# Altium PCB MasterBoard.PcbDoc (part 1 of 4)
Units mil, origin at the board's own origin, x right, y up, seen from the top; angles counter-clockwise.
Board outline 11195 x 7075 mil, 2 copper layers (Top Layer, Bottom Layer); 563 components, 331 nets, 1395 pads, 369 vias.
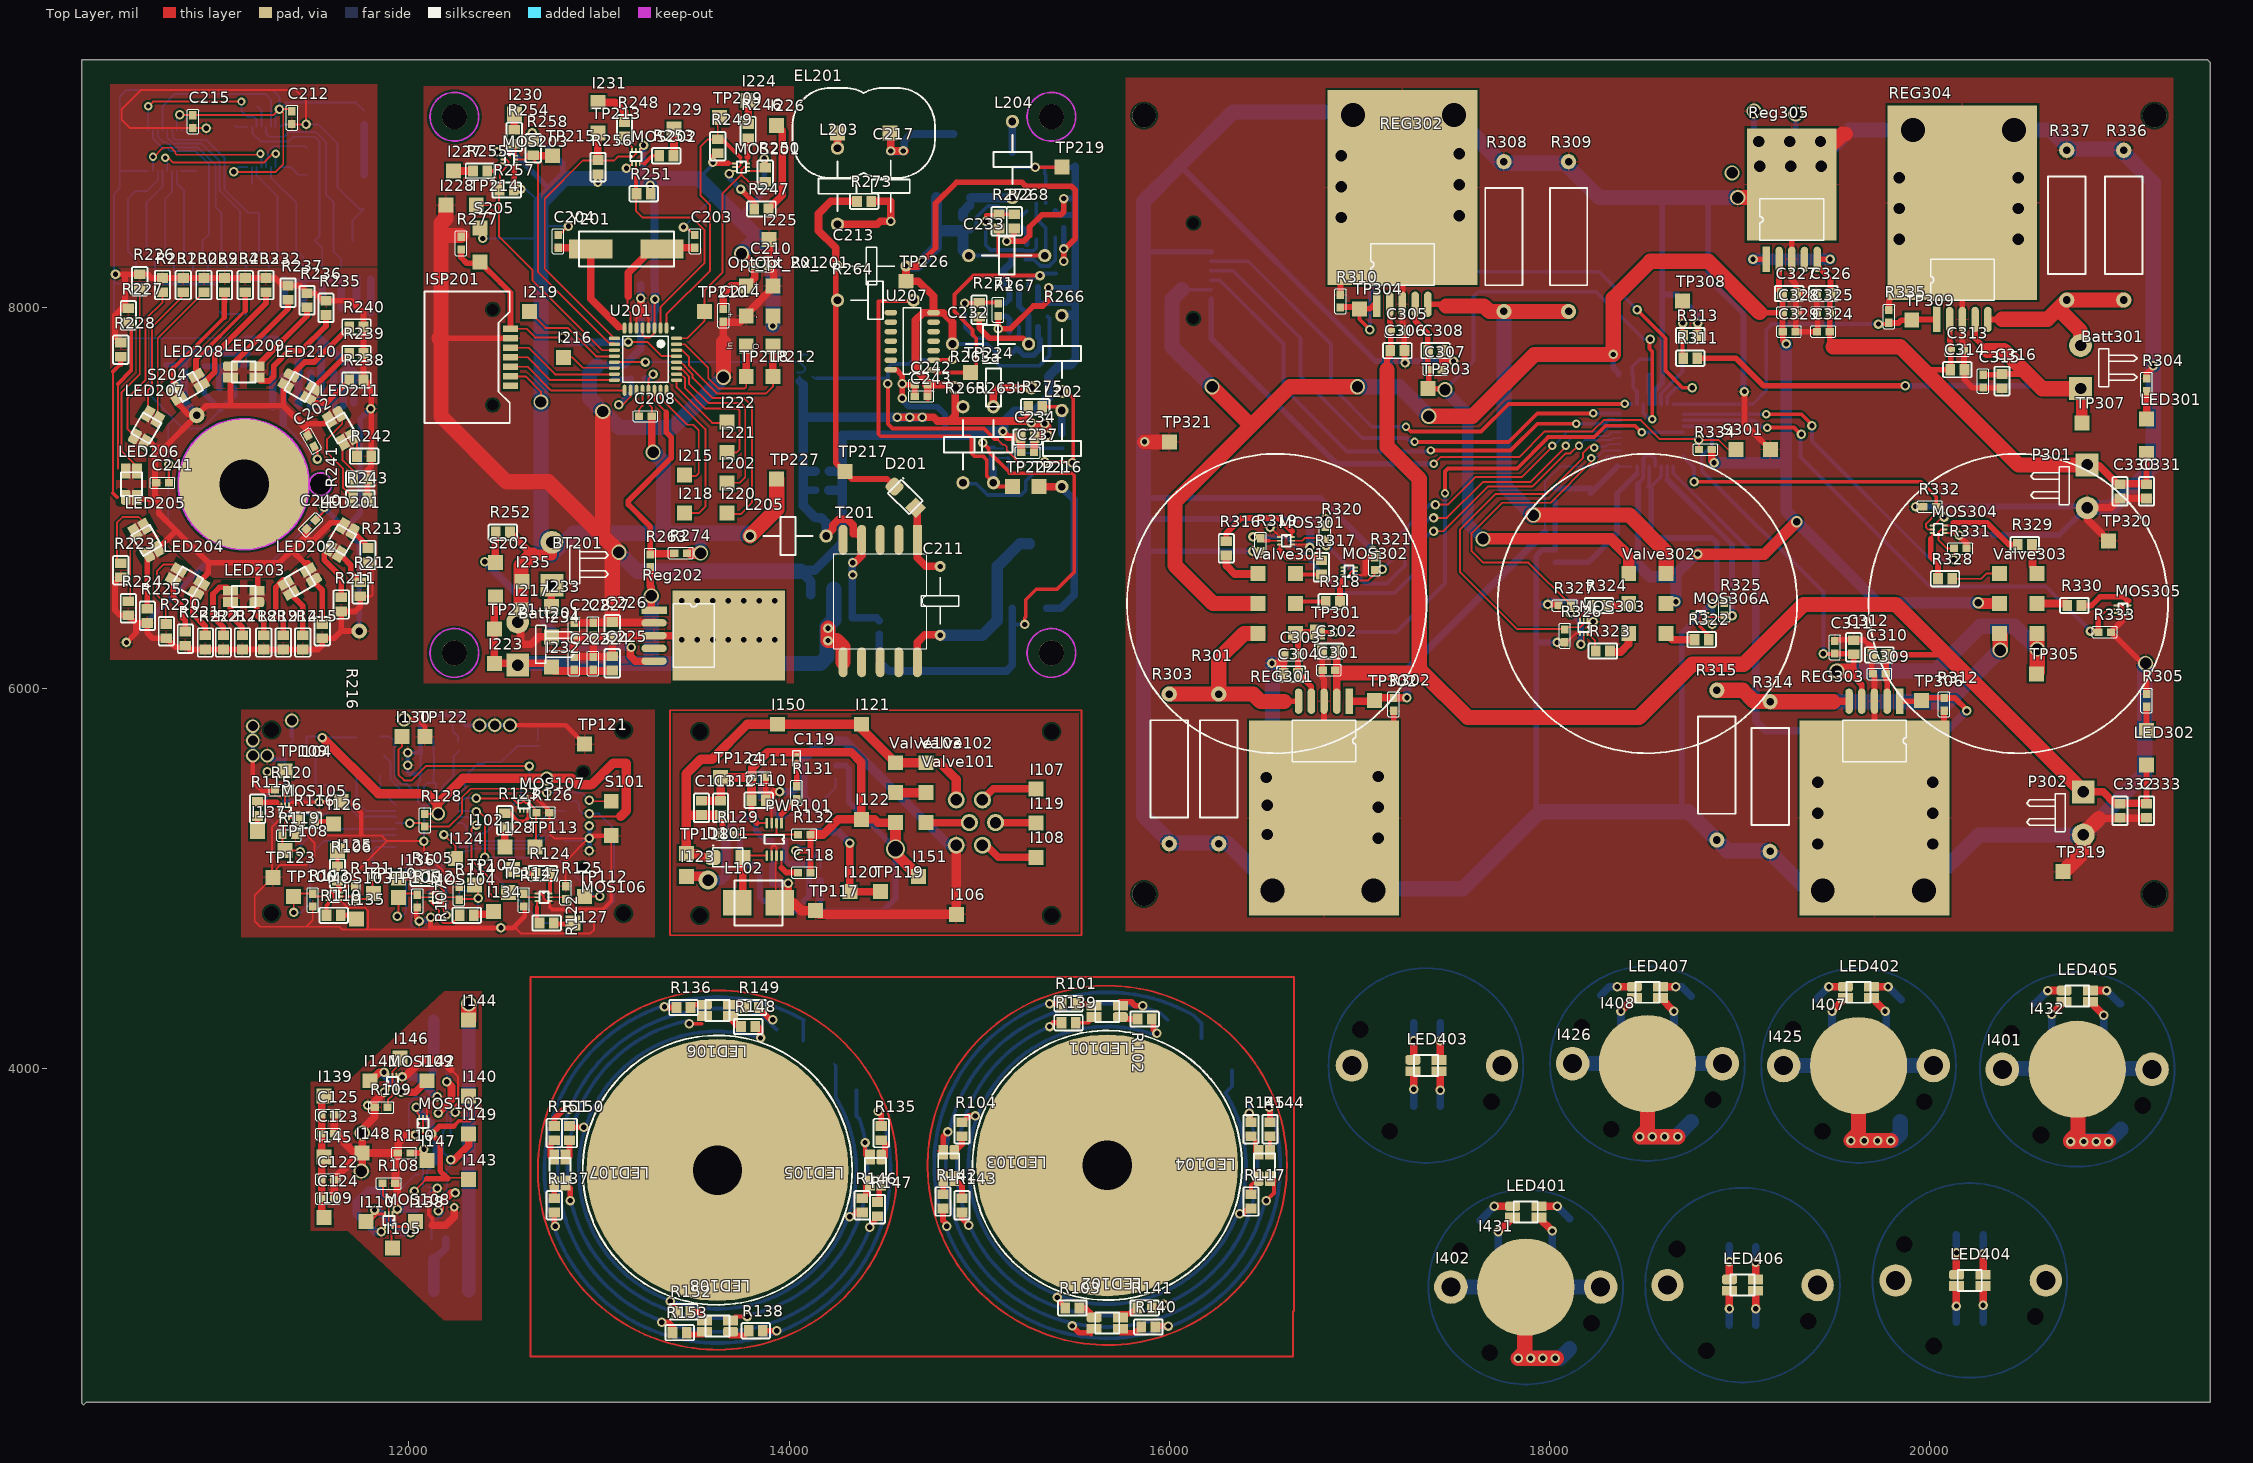
[diagram p0: Top Layer view]
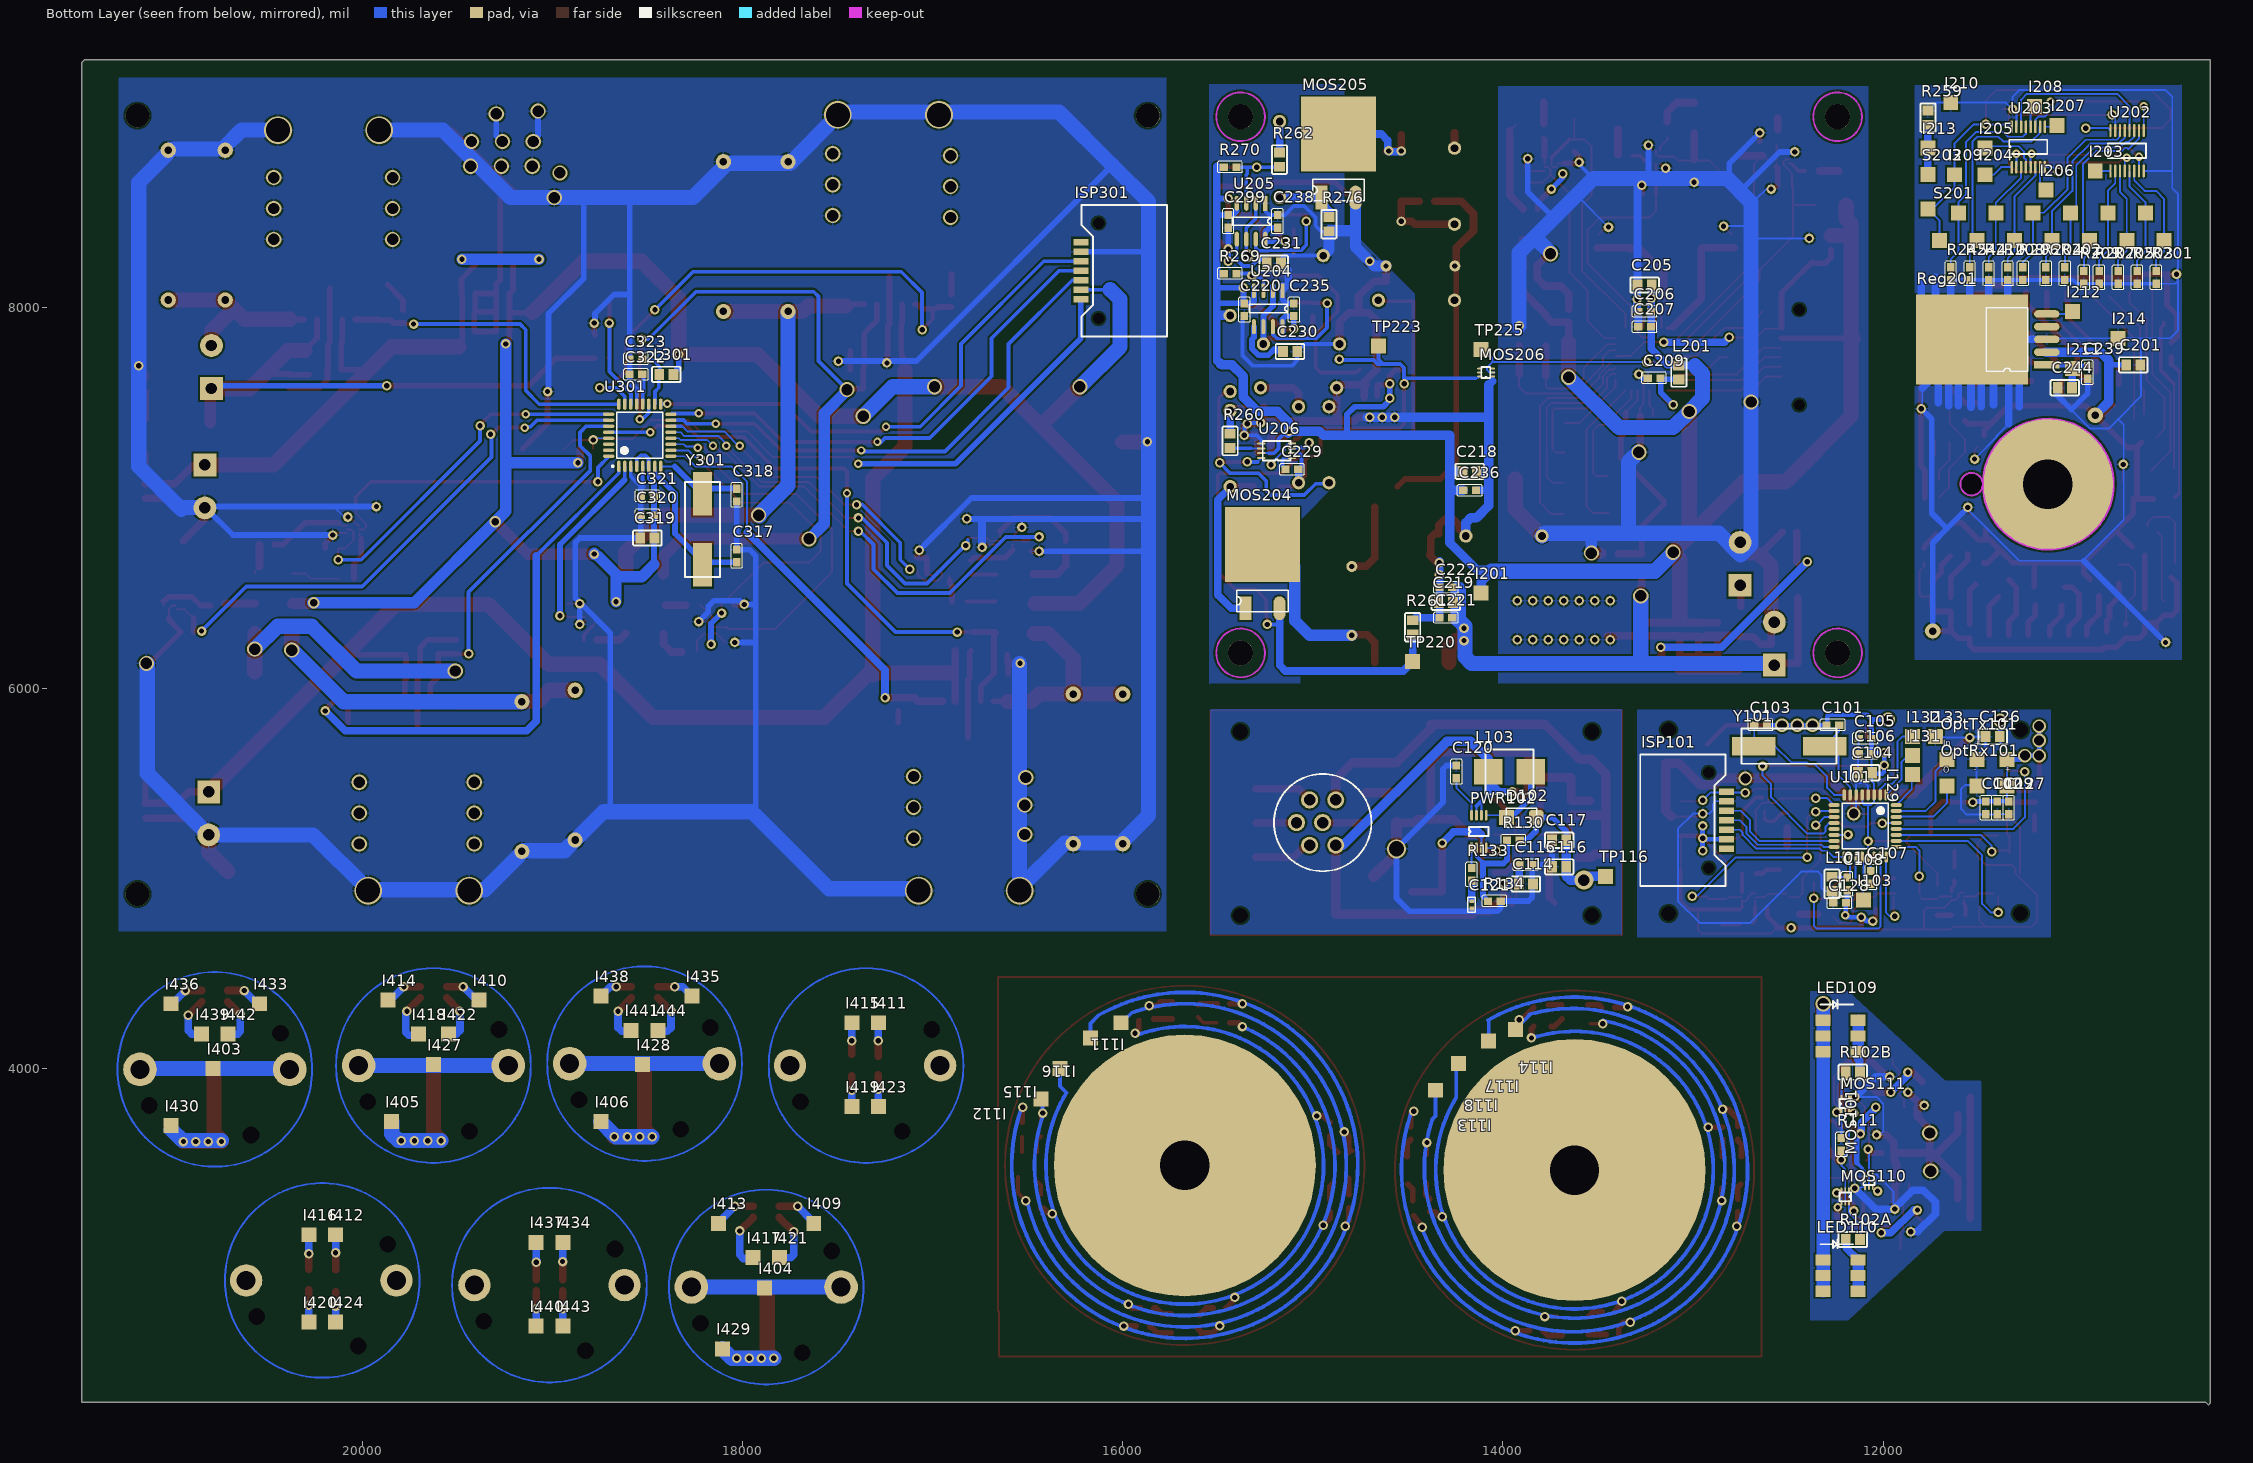
[diagram p1: Bottom Layer view, seen from below]

## Layer stack, top to bottom
Top Layer: signal copper 1.4
Dielectric: dielectric 12.6, FR-4, Dk 4.8
Bottom Layer: signal copper 1.4

## Board outline
10290,9305 21460,9305 21475,9290 21475,2245 10305,2245 10290,2230 10280,2240 10280,9305

## Design rules (kind name [scope] priority, off if disabled: settings)
Clearance [All] p1: gap=10
ComponentClearance [All] p1 off: gap=10 collisioncheckmode=3 verticalgap=10 showdistances=FALSE
HoleSize [All] p1: absolutevalues=TRUE maxlimit=260 minlimit=1 maxpercent=80.000 minpercent=20.000
MinimumSolderMaskSliver [All] p1: minsoldermaskwidth=2.5
PasteMaskExpansion [All] p1 off: expansion=0
PlaneClearance [All] p1: clearance=39.37
PlaneConnect [All] p1: planeconnectstyle=Relief reliefexpansion=20 reliefentries=4 reliefconductorwidth=10 reliefairgap=20
PolygonConnect [All] p1: connectstyle=Relief reliefconductorwidth=10 reliefentries=4 polygonreliefangle="90 Angle"
RoomDefinition Glasses-LEDBoard [InComponentClass('Glasses-LEDBoard')] p1: confinementstyle=ConfineIn formatcopy=TRUE lockcomponents=FALSE outline 11405,4460 11405,2595 12450,2595 12450,4460
RoomDefinition Glasses-LensBoard [InComponentClass('Glasses-LensBoard')] p2: confinementstyle=ConfineIn formatcopy=TRUE lockcomponents=FALSE outline 16685,4505 12630,4505 12630,2475 16685,2475
RoomDefinition Valve [InComponentClass('Valve')] p3: confinementstyle=ConfineIn formatcopy=TRUE lockcomponents=FALSE outline 16760,2285 21365,2285 21365,4605 16760,4605
RoomDefinition Glasses-PSUBoard [InComponentClass('Glasses-PSUBoard')] p4: confinementstyle=ConfineIn formatcopy=TRUE lockcomponents=FALSE outline 15560,5905 13350,5905 13350,4680 15560,4680
RoomDefinition Glasses [InComponentClass('Glasses')] p5: confinementstyle=ConfineIn formatcopy=TRUE lockcomponents=FALSE outline 11120,4665 13300,4665 13300,5935 11120,5935
RoomDefinition Controller-IOBoard [InComponentClass('Controller-IOBoard')] p6: confinementstyle=ConfineIn formatcopy=TRUE lockcomponents=FALSE outline 10350,9250 10350,6105 11895,6105 11895,9250
RoomDefinition Controller [InComponentClass('Controller')] p7: confinementstyle=ConfineIn formatcopy=TRUE lockcomponents=FALSE outline 11965,5970 15660,5970 15660,9250 11965,9250
RoomDefinition Charger [InComponentClass('Charger')] p8: confinementstyle=ConfineIn formatcopy=TRUE lockcomponents=FALSE outline 15710,4665 21340,4665 21340,9285 15710,9285
RoutingVias [All] p1: holewidth=28 width=50 viastyle="Through Hole" minholewidth=20 minwidth=40 maxholewidth=260 maxwidth=300
SilkToSilkClearance [All] p1 off: silktosilkclearance=10
SilkscreenOverComponentPads [All] p1 off: minsilkscreentomaskgap=10
SolderMaskExpansion [All] p1: expansion=4
Width [All] p1: maxlimit=118.11 minlimit=10 preferedwidth=20
20 further rules are at their usual default settings.

## Classes and differential pairs
component class Glasses-LensBoard: I111 I112 I113 I114 I115 I116 I117 I118 LED101 LED102 LED103 LED104 LED105 LED106 LED107 LED108 R101 R102 R103 R104 R117 R135 R136 R137 R138 R139 R140 R141 R142 R143 R144 R145 R146 R147 R148 R149 R150 R151 R152 R153
component class Glasses-PSUBoard: C110 C111 C112 C113 C114 C115 C116 C117 C118 C119 C120 C121 D101 D102 I106 I107 I108 I119 I120 I121 I122 I123 I150 I151 L102 L103 PWR101 PWR102 R129 R130 R131 R132 R133 R134 TP116 TP117 TP118 TP119 TP124 Valve101 Valve102 Valve103
component class Glasses-LEDBoard: C122 C123 C124 C125 I105 I109 I110 I138 I139 I140 I141 I142 I143 I144 I145 I146 I147 I148 I149 LED109 LED110 MOS101 MOS102 MOS108 MOS109 MOS110 MOS111 R102A R102B R108 R109 R110 R111 TP126
component class Controller-IOBoard: C201 C202 C212 C215 C239 C240 C241 C244 I203 I204 I205 I206 I207 I208 I209 I210 I211 I212 I213 I214 LED201 LED202 LED203 LED204 LED205 LED206 LED207 LED208 LED209 LED210 LED211 R201 R202 R203 R204 R205 R206 R207 R208 R209 R210 R211 R212 R213 R214 R215 R216 R217 R218 R219 R220 R221 R222 R223 R224 R225 R226 R227 R228 R229 R230 R231 R232 R233 R234 R235 R236 R237 R238 R239 R240 R241 R242 R243 R244 R245 R259 Reg201 S201 S203 S204 TP201 TP203 TP204 TP205 TP206 TP207 TP208 U202 U203
component class Glasses: C101 C102 C103 C104 C105 C106 C107 C108 C109 C126 C127 C128 I102 I103 I104 I124 I125 I126 I127 I128 I129 I130 I131 I132 I133 I134 I135 I136 I137 I? ISP101 L101 MOS103 MOS104 MOS105 MOS106 MOS107 OptRx101 OptTx101 R105 R106 R107 R112 R113 R114 R115 R116 R118 R119 R120 R121 R122 R123 R124 R125 R126 R127 R128 S101 TP105 TP106 TP107 TP108 TP109 TP110 TP112 TP113 TP114 TP121 TP122 TP123 U101 Y101
component class Controller: Batt201 BT201 C203 C204 C205 C206 C207 C208 C209 C210 C211 C213 C214 C217 C218 C219 C220 C221 C222 C223 C224 C225 C226 C227 C228 C229 C230 C231 C232 C233 C234 C235 C236 C237 C238 C242 C243 C299 D201 EL201 I201 I202 I215 I216 I217 I218 I219 I220 I221 I222 I223 I224 I225 I226 I227 I228 I229 I230 I231 I232 I233 I234 I235 ISP201 L201 L202 L203 L204 L205 MOS201 MOS202 MOS203 MOS204 MOS205 MOS206 Opt_Rx_201 Opt_Tx_201 R246 R247 R248 R249 R250 R251 R252 R253 R254 R255 R256 R257 R258 R260 R261 R262 R263 R263a R263b R264 R265 R266 R267 R268 R269 R270 R271 R272 R273 R274 R275 R276 R277 Reg202 S202 S205 T201 TP209 TP210 TP212 TP213 TP214 TP215 TP216 TP217 TP218 TP219 TP220 TP221 TP222 TP223 TP224 TP225 TP226 TP227 U201 U204 U205 U206 U207 Y201
component class Charger: Batt301 C301 C302 C303 C304 C305 C306 C307 C308 C309 C310 C311 C312 C313 C314 C315 C316 C317 C318 C319 C320 C321 C322 C323 C324 C325 C326 C327 C328 C329 C330 C331 C332 C333 D? ISP301 L301 LED301 LED302 MOS301 MOS302 MOS303 MOS304 MOS305 MOS306A P301 P302 R301 R302 R303 R304 R305 R308 R309 R310 R311 R312 R313 R314 R315 R316 R317 R318 R319 R320 R321 R322 R323 R324 R325 R326 R327 R328 R329 R330 R331 R332 R333 R334 R335 R336 R337 R? REG301 REG302 REG303 REG304 Reg305 S301 TP301 TP302 TP303 TP304 TP305 TP306 TP307 TP308 TP309 TP319 TP320 TP321 U301 Valve301 Valve302 Valve303 Y301
component class Valve: I401 I402 I403 I404 I405 I406 I407 I408 I409 I410 I411 I412 I413 I414 I415 I416 I417 I418 I419 I420 I421 I422 I423 I424 I425 I426 I427 I428 I429 I430 I431 I432 I433 I434 I435 I436 I437 I438 I439 I440 I441 I442 I443 I444 LED401 LED402 LED403 LED404 LED405 LED406 LED407

## Components (designator, comment, footprint, x,y, rotation, side; value= is the part's Value field where it differs from the comment)
Batt201 "BaseBankSocket" HDR1X2H 12620,6180 r90 top
Batt301 "BaseBankSocket" HDR1X2H 20840,7635 r90 top
BT201 "Battery" HDR1X2H 12800,6600 r90 top
C101 "18pf" 0603 12265,5805 r180 bottom
C102 "100nf" 0603 11460,5370 r270 bottom
C103 "18pf" 0603 12645,5805 r0 bottom
C104 "10uf" 0805 12095,5555 r0 bottom
C105 "1uf" 0603 12095,5735 r0 bottom
C106 "100nf" 0603 12095,5655 r0 bottom
C107 "100nf" 0603 12065,5005 r270 bottom
C108 "100nf" 0603 12190,4970 r90 bottom
C109 "100nf" 0603 11400,5370 r270 bottom
C110 "10uf" 0805 13840,5410 r0 top
C111 "1uf" 0603 13840,5530 r0 top
C112 "10uf" 0805 13640,5370 r270 top
C113 "10uf" 0805 13540,5370 r270 top
C114 "10uf" 0805 13880,4970 r0 bottom
C115 "1uf" 0603 13880,5070 r0 bottom
C116 "10uf" 0805 13705,5060 r180 bottom
C117 "10uf" 0805 13705,5200 r180 bottom
C118 "100nf" 0603 14080,5030 r180 top
C119 "2.2nf" 0402 14040,5630 r270 top
C120 "100nf" 0603 14245,5560 r270 bottom
C121 "2.2nf" 0402 14165,4860 r90 bottom
C122 "1uf" 0603 11575,3415 r180 top
C123 "100nf" 0603 11575,3655 r180 top
C124 "1uf" 0603 11575,3315 r180 top
C125 "100nf" 0603 11575,3755 r180 top
C126 "10uf" 0805 11425,5745 r0 bottom
C127 "1uf" 0603 11340,5370 r270 bottom
C128 "100nf" 0603 12230,4870 r0 bottom
C201 "10uf" 0805 10685,7700 r0 bottom
C202 "1uf" 0603 11485,7300 r120 top
C203 "18pf" 0603 13505,8350 r270 top
C204 "18pf" 0603 12785,8350 r270 top
C205 "10uf" 0805 13255,8120 r180 bottom
C206 "1uf" 0603 13255,7980 r180 bottom
C207 "100nf" 0603 13255,7900 r180 bottom
C208 "100nf" 0603 13245,7430 r180 top
C209 "100nf" 0603 13205,7630 r180 bottom
C210 "100nf" 0603 13855,8220 r0 top
C211 "Cap HV" "10n MU Capacitor (HV)" 14795,6640 r270 top
C212 "1uf" 0603 11385,9000 r90 top
C213 "Cap HV" "10n MU Capacitor (HV)" 14615,8220 r180 top
C214 "100nf" 0603 13655,7960 r270 top
C215 "1uf" 0603 10865,8980 r270 top
C217 "Cap HV" "22N MU Capacitor (HV)" 14535,8825.04 r270 top
C218 "10uf" 0805 14175,7140 r180 bottom
C219 "10uf" 0805 14300,6450 r0 bottom
C220 "1uf" 0603 15360,7990 r270 bottom
C221 "1uf" 0603 14300,6370 r0 bottom
C222 "100nf" 0603 14300,6530 r0 bottom
C223 "100nf" 0603 12870,6130 r270 top
C224 "1uf" 0603 12970,6130 r270 top
C225 "10uf" 0805 13070,6130 r270 top
C226 "10uf" 0805 13070,6310 r90 top
C227 "1uf" 0603 12970,6310 r90 top
C228 "100nf" 0603 12870,6310 r90 top
C229 "100nF" 0603 15110,7150 r180 bottom
C230 "10uf" 0805 15120,7770 r0 bottom
C231 "10uf" 0805 15205,8235 r0 bottom
C232 "Cap Through-Hole" "Axial 0.4 MU" 14860,7810 r0 top
C233 "Cap Through-Hole" "Axial 0.4 MU" 14945,8275 r0 top
C234 "10uf" 0805 15255,7320 r0 top
C235 "1uf" 0603 15100,7990 r90 bottom
C236 "100nf" 0603 14175,7040 r180 bottom
C237 "1uf" 0603 15255,7240 r0 top
C238 "100nf" 0603 15185,8455 r90 bottom
C239 "100nf" 0603 10925,7660 r270 bottom
C240 "1uf" 0603 11485,6860 r225 top
C241 "1uf" 0603 10705,7080 r180 top
C242 "1uf" 0603 14695,7595 r0 top
C243 "100nf" 0603 14695,7535 r0 top
C244 "10uf" 0805 11045,7580 r0 bottom
C299 "100nf" 0603 15445,8455 r270 bottom
C301 "1uf" 0603 16840,6095 r0 top
C302 "10uf" 0805 16840,6195 r0 top
C303 "1uf" 0603 16640,6175 r0 top
C304 "10uf" 0805 16640,6075 r0 top
C305 "1uf" 0603 17200,7875 r180 top
C306 "10uf" 0805 17200,7775 r180 top
C307 "1uf" 0603 17400,7675 r180 top
C308 "10uf" 0805 17400,7775 r180 top
C309 "1uf" 0603 19735,6075 r0 top
C310 "10uf" 0805 19735,6175 r0 top
C311 "1uf" 0603 19500,6215 r270 top
C312 "10uf" 0805 19600,6215 r270 top
C313 "1uf" 0603 20145,7775 r180 top
C314 "10uf" 0805 20145,7675 r180 top
C315 "1uf" 0603 20280,7615 r90 top
C316 "10uf" 0805 20380,7615 r90 top
C317 "18pf" 0603 18030,6695 r270 bottom
C318 "18pf" 0603 18030,7015 r90 bottom
C319 "10uf" 0805 18500,6790 r180 bottom
C320 "1uf" 0603 18500,6910 r180 bottom
C321 "100nf" 0603 18500,7010 r180 bottom
C322 "100nf" 0603 18560,7650 r180 bottom
C323 "100nf" 0603 18560,7730 r180 bottom
C324 "100nf" 0603 19440,7875 r0 top
C325 "1uf" 0603 19440,7975 r0 top
C326 "10uf" 0805 19440,8075 r0 top
C327 "10uf" 0805 19260,8075 r180 top
C328 "1uf" 0603 19260,7975 r180 top
C329 "100nf" 0603 19260,7875 r180 top
C330 "10uf" 0805 21000,7035 r90 top
C331 "10uf" 0805 21140,7035 r90 top
C332 "10uf" 0805 21000,5355 r90 top
C333 "10uf" 0805 21140,5355 r90 top
D101 "Diode BYG20D" BYG20J-E3 13600,5110 r0 top
D102 "Diode BYG20D" BYG20J-E3 13825,5320 r0 bottom
D201 "Diode BYG20D" BYG20J-E3 14555,7060 r315 top
EL201 "EL Connector" "HV connector" 14255,8920 r0 top
I102 "TestPoint" TestPoint 12545,5045 r90 top
I103 "TestPoint" TestPoint 12105,4885 r90 bottom
I104 "TestPoint" TestPoint 11645,5405 r90 top
I105 "TestPoint" TestPoint 11915,3055 r90 top
I106 "TestPoint" TestPoint 14880,4810 r270 top
I107 "TestPoint" TestPoint 15300,5470 r180 top
I108 "TestPoint" TestPoint 15300,5110 r180 top
I109 "TestPoint" TestPoint 11555,3215 r270 top
I110 "TestPoint" TestPoint 11775,3195 r270 top
I111 "TestPoint" TestPoint 16010,4240 r270 bottom
I112 "TestPoint" TestPoint 16430,3840 r270 bottom
I113 "TestPoint" TestPoint 14355,3885 r90 bottom
I114 "TestPoint" TestPoint 13935,4205 r90 bottom
I115 "TestPoint" TestPoint 16330,4000 r270 bottom
I116 "TestPoint" TestPoint 16170,4160 r270 bottom
I117 "TestPoint" TestPoint 14075,4145 r90 bottom
I118 "TestPoint" TestPoint 14235,4025 r90 bottom
I119 "TestPoint" TestPoint 15300,5290 r180 top
I120 "TestPoint" TestPoint 14320,4930 r270 top
I121 "TestPoint" TestPoint 14380,5810 r270 top
I122 "TestPoint" TestPoint 14380,5310 r270 top
I123 "TestPoint" TestPoint 13460,5010 r270 top
I124 "TestPoint" TestPoint 12245,5105 r0 top
I125 "TestPoint" TestPoint 11625,5145 r0 top
I126 "TestPoint" TestPoint 11605,5285 r270 top
I127 "TestPoint" TestPoint 12865,4765 r0 top
I128 "TestPoint" TestPoint 12505,5165 r90 top
I129 "TestPoint" TestPoint 11845,5545 r180 bottom
I130 "TestPoint" TestPoint 11965,5745 r0 top
I131 "TestPoint" TestPoint 11845,5645 r180 bottom
I132 "TestPoint" TestPoint 11845,5745 r180 bottom
I133 "TestPoint" TestPoint 11725,5745 r180 bottom
I134 "TestPoint" TestPoint 12445,4825 r0 top
I135 "TestPoint" TestPoint 11725,4785 r0 top
I136 "TestPoint" TestPoint 11945,5000 r0 top
I137 "TestPoint" TestPoint 11205,5245 r270 top
I138 "TestPoint" TestPoint 12035,3195 r0 top
I139 "TestPoint" TestPoint 11555,3855 r0 top
I140 "TestPoint" TestPoint 12315,3855 r0 top
I141 "TestPoint" TestPoint 11795,3935 r0 top
I142 "TestPoint" TestPoint 12095,3935 r0 top
I143 "TestPoint" TestPoint 12315,3415 r0 top
I144 "TestPoint" TestPoint 12315,4255 r0 top
I145 "TestPoint" TestPoint 11555,3535 r0 top
I146 "TestPoint" TestPoint 11955,4055 r0 top
I147 "TestPoint" TestPoint 12095,3515 r0 top
I148 "TestPoint" TestPoint 11755,3555 r0 top
I149 "TestPoint" TestPoint 12315,3655 r0 top
I150 "TestPoint" TestPoint 13940,5810 r270 top
I151 "TestPoint" TestPoint 14680,5010 r270 top
I201 "TestPoint" TestPoint 14115,6500 r0 bottom
I202 "TestPoint" TestPoint 13675,7080 r270 top
I203 "TestPoint" TestPoint 10885,8720 r180 bottom
I204 "TestPoint" TestPoint 11465,8700 r180 bottom
I205 "TestPoint" TestPoint 11465,8840 r0 bottom
I206 "TestPoint" TestPoint 11145,8620 r0 bottom
I207 "TestPoint" TestPoint 11085,8960 r0 bottom
I208 "TestPoint" TestPoint 11205,9060 r0 bottom
I209 "TestPoint" TestPoint 11625,8700 r0 bottom
I210 "TestPoint" TestPoint 11645,9080 r0 bottom
I211 "TestPoint" TestPoint 11005,7680 r0 bottom
I212 "TestPoint" TestPoint 11005,7980 r0 bottom
I213 "TestPoint" TestPoint 11765,8840 r0 bottom
I214 "TestPoint" TestPoint 10765,7840 r0 bottom
I215 "TestPoint" TestPoint 13450,7120 r90 top
I216 "TestPoint" TestPoint 12815,7740 r90 top
I217 "TestPoint" TestPoint 12590,6410 r90 top
I218 "TestPoint" TestPoint 13450,6920 r90 top
I219 "TestPoint" TestPoint 12635,7980 r90 top
I220 "TestPoint" TestPoint 13675,6920 r90 top
I221 "TestPoint" TestPoint 13675,7240 r90 top
I222 "TestPoint" TestPoint 13675,7400 r90 top
I223 "TestPoint" TestPoint 12450,6130 r90 top
I224 "TestPoint" TestPoint 13785,9090 r90 top
I225 "TestPoint" TestPoint 13895,8360 r90 top
I226 "TestPoint" TestPoint 13935,8960 r90 top
I227 "TestPoint" TestPoint 12235,8720 r90 top
I228 "TestPoint" TestPoint 12195,8540 r90 top
I229 "TestPoint" TestPoint 13395,8940 r90 top
I230 "TestPoint" TestPoint 12555,9020 r90 top
I231 "TestPoint" TestPoint 12995,9080 r90 top
I232 "TestPoint" TestPoint 12750,6110 r90 top
I233 "TestPoint" TestPoint 12750,6430 r90 top
I234 "TestPoint" TestPoint 12750,6270 r90 top
I235 "TestPoint" TestPoint 12595,6560 r90 top
I401 "Battery +VE" ValveBattery+VE 20775,3995 r180 top
I402 "Battery +VE" ValveBattery+VE 17875,2850 r180 top
I403 "ValvePad+ve" TestPoint 20785,4000 r180 bottom
I404 "ValvePad+ve" TestPoint 17885,2845 r180 bottom
I405 "ValvePad-ve" TestPoint 19845,3720 r180 bottom
I406 "ValvePad-ve" TestPoint 18745,3720 r180 bottom
I407 "Battery -VE" ValveBattery-VE 19625,4015 r0 top
I408 "Battery -VE" ValveBattery-VE 18515,4025 r0 top
I409 "ValvePadR" TestPoint 17625,3185 r180 bottom
I410 "ValvePadR" TestPoint 19385,4360 r180 bottom
I411 "ValvePadR" TestPoint 17285,4240 r180 bottom
I412 "ValvePadR" TestPoint 20140,3125 r180 bottom
I413 "ValvePadG" TestPoint 18125,3185 r180 bottom
I414 "ValvePadG" TestPoint 19865,4360 r180 bottom
I415 "ValvePadG" TestPoint 17425,4240 r180 bottom
I416 "ValvePadG" TestPoint 20280,3125 r180 bottom
I417 "ValvePadB" TestPoint 17945,3005 r180 bottom
I418 "ValvePadB" TestPoint 19705,4180 r180 bottom
I419 "ValvePadB" TestPoint 17425,3800 r180 bottom
I420 "ValvePadB" TestPoint 20280,2665 r180 bottom
I421 "ValvePadVcc" TestPoint 17805,3005 r180 bottom
I422 "ValvePadVcc" TestPoint 19545,4180 r180 bottom
I423 "ValvePadVcc" TestPoint 17285,3800 r180 bottom
I424 "ValvePadVcc" TestPoint 20140,2665 r180 bottom
I425 "Battery +VE" ValveBattery+VE 19625,4015 r180 top
I426 "Battery +VE" ValveBattery+VE 18515,4025 r180 top
I427 "ValvePad+ve" TestPoint 19625,4020 r180 bottom
I428 "ValvePad+ve" TestPoint 18525,4020 r180 bottom
I429 "ValvePad-ve" TestPoint 18105,2525 r180 bottom
I430 "ValvePad-ve" TestPoint 21005,3700 r180 bottom
I431 "Battery -VE" ValveBattery-VE 17875,2850 r0 top
I432 "Battery -VE" ValveBattery-VE 20775,3995 r0 top
I433 "ValvePadR" TestPoint 20540,4340 r180 bottom
I434 "ValvePadR" TestPoint 18945,3085 r180 bottom
I435 "ValvePadR" TestPoint 18265,4380 r180 bottom
I436 "ValvePadG" TestPoint 21005,4340 r180 bottom
I437 "ValvePadG" TestPoint 19085,3085 r180 bottom
I438 "ValvePadG" TestPoint 18745,4380 r180 bottom
I439 "ValvePadB" TestPoint 20845,4180 r180 bottom
I440 "ValvePadB" TestPoint 19085,2645 r180 bottom
I441 "ValvePadB" TestPoint 18585,4200 r180 bottom
I442 "ValvePadVcc" TestPoint 20705,4180 r180 bottom
I443 "ValvePadVcc" TestPoint 18945,2645 r180 bottom
I444 "ValvePadVcc" TestPoint 18445,4200 r180 bottom
ISP101 "SATA" SATA 12825,5305 r90 bottom
ISP201 "SATA" SATA 12535,7740 r90 top
ISP301 "SATA" SATA 16220,8195 r270 bottom
L101 "10uH" 0805 12270,4970 r270 bottom
L102 "ELL-6PG4R7N" ELL6PG4R7N-2CHK 13840,4870 r180 top
L103 "ELL-6PG4R7N" ELL6PG4R7N-2CHK 13965,5560 r180 bottom
L201 "10uH" 0805 13075,7660 r90 bottom
L202 "Inductor" "Axial 0.4 MU" 15435,7460 r270 top
L203 "Inductor" "Axial 0.4 MU" 14255,8440 r90 top
L204 "Inductor" "Axial 0.4 MU" 15175,8980 r270 top
L205 "Inductor" "Axial 0.4 MU" 14195,6800 r180 top
L301 "10uH" 0805 18400,7650 r180 bottom
LED101 "Tri LED" CLV1A-FKB 15673.66,4300 r180 top
LED102 "Tri LED" CLV1A-FKB 15673.66,2660 r0 top
LED103 "Tri LED" CLV1A-FKB 14840,3490 r270 top
LED104 "Tri LED" CLV1A-FKB 16500,3490 r90 top
LED105 "Tri LED" CLV1A-FKB 14455,3465 r270 top
LED106 "Tri LED" CLV1A-FKB 13623.66,4305 r0 top
LED107 "Tri LED" CLV1A-FKB 12795,3465 r90 top
LED108 "Tri LED" CLV1A-FKB 13623.66,2645 r180 top
LED109 "LED_head" "LED Headlamp" 12225,4170 r180 bottom
LED110 "LED_head" "LED Headlamp" 12225,2910 r180 bottom
LED201 "Tri LED" CLV1A-FKB 11645,6780 r240 top
LED202 "Tri LED" CLV1A-FKB 11427.05,6560.79 r210 top
LED203 "Tri LED" CLV1A-FKB 11131.77,6482.05 r180 top
LED204 "Tri LED" CLV1A-FKB 10836.5,6560.79 r150 top
LED205 "Tri LED" CLV1A-FKB 10619.96,6777.32 r120 top
LED206 "Tri LED" CLV1A-FKB 10541.22,7072.6 r90 top
LED207 "Tri LED" CLV1A-FKB 10619.96,7367.87 r60 top
LED208 "Tri LED" CLV1A-FKB 10836.5,7584.41 r30 top
LED209 "Tri LED" CLV1A-FKB 11131.77,7663.15 r0 top
LED210 "Tri LED" CLV1A-FKB 11427.05,7584.41 r330 top
LED211 "Tri LED" CLV1A-FKB 11643.58,7367.87 r300 top
LED301 "LED_head" "2 pin switch (surface mount)" 21140,7235 r90 top
LED302 "LED_head" "2 pin switch (surface mount)" 21140,5595 r90 top
LED401 "Tri LED" CLV1A-FKB 17875,3245 r0 top
LED402 "Tri LED" CLV1A-FKB 19625,4400 r0 top
LED403 "Tri LED" CLV1A-FKB 17350,4015 r0 top
LED404 "Tri LED" CLV1A-FKB 20210,2885 r0 top
LED405 "Tri LED" CLV1A-FKB 20775,4380 r0 top
LED406 "Tri LED" CLV1A-FKB 19015,2860 r0 top
LED407 "Tri LED" CLV1A-FKB 18515,4400 r0 top
MOS101 "EM6K7T2RCT-ND" EM6K7T2R-EMT6 12095,3375 r90 bottom
MOS102 "EM6K7T2RCT-ND" EM6K7T2R-EMT6 12055,3675 r90 top
MOS103 "EM6K7T2RCT-ND" EM6K7T2R-EMT6 11575,4925 r0 top
MOS104 "EM6K7T2RCT-ND" EM6K7T2R-EMT6 12185,4880 r180 top
MOS105 "EM6K7T2RCT-ND" EM6K7T2R-EMT6 11370,5385 r270 top
MOS106 "EM6K7T2RCT-ND" EM6K7T2R-EMT6 12675,4920 r0 top
MOS107 "EM6K7T2RCT-ND" EM6K7T2R-EMT6 12625,5425 r270 top
MOS108 "EM6K7T2RCT-ND" EM6K7T2R-EMT6 11915,3235 r270 top
MOS109 "EM6K7T2RCT-ND" EM6K7T2R-EMT6 11895,3895 r90 top
MOS110 "EM6K7T2RCT-ND" EM6K7T2R-EMT6 12180,3360 r270 bottom
MOS111 "EM6K7T2RCT-ND" EM6K7T2R-EMT6 12220,3780 r90 bottom
MOS201 "EM6K7T2RCT-ND" EM6K7T2R-EMT6 13715,8760 r0 top
MOS202 "EM6K7T2RCT-ND" EM6K7T2R-EMT6 13175,8760 r90 top
MOS203 "EM6K7T2RCT-ND" EM6K7T2R-EMT6 12495,8800 r0 top
MOS204 "STD5NK52ZD" DPAK 15355,6420 r90 bottom
MOS205 "STD5NK52ZD" DPAK 14955,8580 r90 bottom
MOS206 "EM6K7T2RCT-ND" EM6K7T2R-EMT6 14055,7640 r0 bottom
MOS301 "EM6K7T2RCT-ND" EM6K7T2R-EMT6 16580,6795 r0 top
MOS302 "EM6K7T2RCT-ND" EM6K7T2R-EMT6 16980,6595 r180 top
MOS303 "EM6K7T2RCT-ND" EM6K7T2R-EMT6 18200,6355 r270 top
MOS304 "EM6K7T2RCT-ND" EM6K7T2R-EMT6 20080,6815 r180 top
MOS305 "EM6K7T2RCT-ND" EM6K7T2R-EMT6 20980,6435 r0 top
MOS306A "EM6K7T2RCT-ND" EM6K7T2R-EMT6 18760,6395 r0 top
Opt_Rx_201 "TORX177" "Optical RX" 13915,7800 r90 top
Opt_Tx_201 "LTDL-TX12P03" "Optical TX" 13775,7800 r90 top
OptRx101 "TORX177" "Optical RX" 11665,5485 r180 bottom
OptTx101 "LTDL-TX12P03" "Optical TX" 11665,5625 r180 bottom
P301 "12VDC In" HDR1X2H 20780,7115 r270 top
P302 "3V3 In" HDR1X2H 20760,5395 r270 top
PWR101 "TPS61085PWR" TPS61085-MSOP8 13960,5290 r270 top
PWR102 "TPS61085PWR" TPS61085-MSOP8 14165,5160 r90 bottom
R101 "56R" 0805 15470,4340 r0 top
R102 "67R" 0805 15870,4260 r180 top
R102A "Res3" 0805 12160,3100 r0 bottom
R102B "Res3" 0805 12160,3980 r180 bottom
R103 "67R" 0805 15490,2740 r0 top
R104 "67R" 0805 14910,3680 r270 top
R105 "Res3" 0805 12085,5000 r0 top
R106 "Res3" 0805 11625,5025 r270 top
R107 "Res3" 0805 12305,4805 r180 top
R108 "10k" 0603 11895,3395 r180 top
R109 "10k" 0603 11855,3795 r0 top
R110 "10k" 0603 11975,3555 r0 top
R111 "10k" 0603 12220,3600 r270 bottom
R112 "10k" 0603 12045,4880 r90 top
R113 "10k" 0603 11495,4885 r90 top
R114 "10k" 0603 12265,4920 r270 top
R115 "Res3" 0805 11205,5365 r90 top
R116 "Res3" 0805 11465,5305 r180 top
R117 "67R" 0805 16430,3300 r90 top
R118 "Res3" 0805 11605,4805 r180 top
R119 "10k" 0603 11370,5225 r180 top
R120 "10k" 0603 11330,5465 r0 top
R121 "10k" 0603 11715,4925 r270 top
R122 "Res3" 0805 12725,4765 r180 top
R123 "Res3" 0805 12505,5305 r90 top
R124 "Res3" 0805 12705,5025 r0 top
R125 "10k" 0603 12825,4925 r270 top
R126 "10k" 0603 12705,5345 r180 top
R127 "10k" 0603 12605,4885 r90 top
R128 "10k" 0603 12085,5305 r90 top
R129 "54.9k" 0603 13680,5230 r180 top
R130 "54.9k" 0603 13945,5200 r180 bottom
R131 "22K" 0603 14040,5450 r270 top
R132 "18K" 0603 14080,5230 r180 top
R133 "22k" 0603 14165,5020 r90 bottom
R134 "18k" 0603 14045,4880 r0 bottom
R135 "67R" 0805 14485,3660 r270 top
R136 "67R" 0805 13445,4320 r0 top
R137 "67R" 0805 12765,3280 r90 top
R138 "67R" 0805 13825,2620 r180 top
R139 "56R" 0805 15470,4240 r0 top
R140 "56R" 0805 15890,2640 r180 top
R141 "56R" 0805 15870,2740 r180 top
R142 "56R" 0805 14810,3300 r90 top
R143 "56R" 0805 14910,3280 r90 top
R144 "56R" 0805 16530,3680 r270 top
R145 "56R" 0805 16430,3680 r270 top
R146 "56R" 0805 14385,3280 r90 top
R147 "56R" 0805 14465,3260 r90 top
R148 "56R" 0805 13785,4220 r180 top
R149 "56R" 0805 13805,4320 r180 top
R150 "56R" 0805 12845,3660 r270 top
R151 "56R" 0805 12765,3660 r270 top
R152 "56R" 0805 13445,2720 r0 top
R153 "56R" 0805 13425,2610 r0 top
R201 "10k" 0603 10565,8160 r270 bottom
R202 "10k" 0603 11045,8180 r90 bottom
R203 "10k" 0603 10665,8160 r270 bottom
R204 "10k" 0603 11145,8180 r90 bottom
R205 "10k" 0603 10765,8160 r270 bottom
R206 "10k" 0603 11265,8180 r90 bottom
R207 "10k" 0603 10865,8160 r270 bottom
R208 "10k" 0603 11345,8180 r90 bottom
R209 "10k" 0603 10945,8160 r270 bottom
R210 "10k" 0603 11445,8180 r90 bottom
R211 "Res1" 0805 11645,6440 r90 top
R212 "Res1" 0805 11745,6520 r90 top
R213 "Res1" 0805 11785,6700 r90 top
R214 "Res1" 0805 11340,6240 r90 top
R215 "Res1" 0805 11442.5,6240 r90 top
R216 "Res1" 0805 11545,6300 r90 top
R217 "Res1" 0805 11025,6240 r90 top
R218 "Res1" 0805 11125,6240 r90 top
R219 "Res1" 0805 11237.5,6240 r90 top
R220 "Res1" 0805 10725,6300 r90 top
R221 "Res1" 0805 10825,6260 r90 top
R222 "Res1" 0805 10930,6240 r90 top
R223 "Res1" 0805 10485,6620 r90 top
R224 "Res1" 0805 10525,6420 r90 top
R225 "Res1" 0805 10625,6380 r90 top
R226 "Res1" 0805 10585,8140 r270 top
R227 "Res1" 0805 10525,7960 r270 top
R228 "Res1" 0805 10485,7780 r270 top
R229 "Res1" 0805 10922.5,8120 r270 top
R230 "Res1" 0805 10813.75,8120 r270 top
R231 "Res1" 0805 10705,8120 r270 top
R232 "Res1" 0805 11248.75,8120 r270 top
R233 "Res1" 0805 11140,8120 r270 top
R234 "Res1" 0805 11031.25,8120 r270 top
R235 "Res1" 0805 11565,8000 r270 top
R236 "Res1" 0805 11465,8040 r270 top
R237 "Res1" 0805 11365,8080 r270 top
R238 "Res1" 0805 11725,7620 r180 top
R239 "Res1" 0805 11725,7760 r180 top
R240 "Res1" 0805 11725,7900 r180 top
R241 "Res1" 0805 11745,7100 r180 top
R242 "Res1" 0805 11765,7220 r180 top
R243 "Res1" 0805 11745,7000 r180 top
R244 "10k" 0603 11545,8180 r90 bottom
R245 "10k" 0603 11645,8180 r270 bottom
R246 "Res3" 0805 13785,8930 r270 top
R247 "Res3" 0805 13855,8520 r180 top
R248 "Res3" 0805 13135,8940 r270 top
R249 "Res3" 0805 13625,8850 r90 top
R250 "Res3" 0805 13875,8700 r270 top
R251 "Res3" 0805 13235,8600 r180 top
R252 "Res1" 0805 12495,6820 r0 top
R253 "Res3" 0805 13355,8800 r180 top
R254 "Res3" 0805 12555,8900 r270 top
R255 "Res3" 0805 12375,8720 r0 top
R256 "Res3" 0805 12995,8740 r90 top
R257 "Res3" 0805 12515,8620 r180 top
R258 "Res3" 0805 12655,8840 r270 top
R259 "Res1" 0805 11765,9000 r90 bottom
R260 "4R5" 0805 15435,7300 r270 bottom
R261 "330R" 0805 14475,6320 r90 bottom
R262 "4R5" 0805 15175,8780 r270 bottom
R263 "10k" 0603 13270,6670 r90 top
R263a "Precision ThroughHole" "Axial 0.4 MU" 15275,7580 r180 top
R263b "Precision ThroughHole" "Axial 0.4 MU" 15075,7080 r90 top
R264 "Precision ThroughHole" "Axial 0.4 MU" 14655,8040 r180 top
R265 "Precision ThroughHole" "Axial 0.4 MU" 14915,7080 r90 top
R266 "Precision ThroughHole" "Axial 0.4 MU" 15435,7560 r90 top
R267 "18k" 0603 15100,7990 r90 top
R268 "7.2k" 0805 15185,8455 r90 top
R269 "10k" 0603 15435,8180 r0 bottom
R270 "10k" 0603 15435,8740 r0 bottom
R271 "8.2k" 0805 15000,7990 r270 top
R272 "33k" 0805 15105,8455 r270 top
R273 "10R" 0805 14395,8560 r0 top
R274 "10k" 0603 13430,6710 r0 top
R275 "Res3" 0805 15295,7480 r180 top
R276 "Res3" 0805 14915,8440 r90 bottom
R277 "10k" 0603 12275,8340 r90 top
R301 "2R2 1W" "Resistor 1W" 16260,5575 r270 top
R302 "10k" 0603 17180,5915 r90 top
R303 "2R2 1W" "Resistor 1W" 16000,5575 r270 top
R304 "10k" 0603 21140,7595 r270 top
R305 "10k" 0603 21140,5935 r270 top
R308 "2R2 1W" "Resistor 1W" 17760,8375 r90 top
R309 "2R2 1W" "Resistor 1W" 18100,8375 r90 top
R310 "10k" 0603 16900,8035 r270 top
R311 "Res3" 0805 18740,7735 r0 top
R312 "10k" 0603 20075,5915 r90 top
R313 "Res3" 0805 18740,7855 r180 top
R314 "2R2 1W" "Resistor 1W" 19160,5535 r90 top
R315 "2R2 1W" "Resistor 1W" 18880,5595 r90 top
R316 "Res3" 0805 16300,6735 r90 top
R317 "Res3" 0805 16800,6635 r90 top
R318 "Res3" 0805 16860,6455 r0 top
R319 "10k" 0603 16480,6755 r90 top
R320 "10k" 0603 16820,6815 r270 top
R321 "10k" 0603 17080,6655 r270 top
R322 "Res3" 0805 18800,6255 r0 top
R323 "Res3" 0805 18280,6195 r180 top
R324 "Res3" 0805 18260,6435 r180 top
R325 "10k" 0603 18920,6415 r270 top
R326 "10k" 0603 18080,6275 r90 top
R327 "10k" 0603 18080,6435 r0 top
R328 "Res3" 0805 20080,6575 r180 top
R329 "Res3" 0805 20500,6755 r180 top
R330 "Res3" 0805 20760,6435 r0 top
R331 "10k" 0603 20160,6735 r180 top
R332 "10k" 0603 20000,6955 r0 top
R333 "10k" 0603 20920,6295 r180 top
R334 "10k" 0603 18820,7255 r0 top
R335 "10k" 0603 19785,7955 r270 top
R336 "2R2 1W" "Resistor 1W" 21020,8435 r270 top
R337 "2R2 1W" "Resistor 1W" 20720,8435 r270 top
Reg201 "Reg104-5" REG104-5-DDPAK5 11140,7700 r0 bottom
Reg202 "Reg104-5" REG104-5-DDPAK5 13290,6410 r0 top
REG301 "TPS7A4501DCQR" "TPS7A4501KTTR heatsinked" 16680,5935 r270 top
REG302 "TPS7A4501DCQR" "TPS7A4501KTTR heatsinked" 17360,8015 r90 top
REG303 "TPS7A4501DCQR" "TPS7A4501KTTR heatsinked" 19575,5935 r270 top
REG304 "TPS7A4501KTTR" "TPS7A4501KTTR heatsinked" 20305,7935 r90 top
Reg305 "Reg104-5" REG104-5-DDPAK5 19140,8255 r90 top
S101 "SW-PB" "2 pin switch (surface mount)" 13065,5405 r270 top
S201 "SW-12WAY" "switch pad layout" 11605,8500 r270 bottom
S202 "SW-KEY" "2 pin switch (surface mount)" 12455,6480 r90 top
S203 "SW-SPST" "2 pin switch (surface mount)" 11765,8520 r90 bottom
S204 "SW-12WAY" "12 pole switch" 11131.77,7072.6 r270 top
S205 "SW-PB" "2 pin switch (surface mount)" 12375,8240 r90 top
S301 "SW-PB" "2 pin switch (surface mount)" 18980,7255 r0 top
T201 "SI3210 SMD Transformer" "SI3210 SMD Transformer" 14675,6780 r270 top
TP105 "TestPoint" TestPoint 11945,4900 r90 top
TP106 "TestPoint" TestPoint 11395,4905 r90 top
TP107 "TestPoint" TestPoint 12345,4965 r90 top
TP108 "TestPoint" TestPoint 11350,5145 r0 top
TP109 "TestPoint" TestPoint 11350,5565 r0 top
TP110 "TestPoint" TestPoint 11815,4920 r90 top
TP112 "TestPoint" TestPoint 12925,4905 r90 top
TP113 "TestPoint" TestPoint 12665,5165 r180 top
TP114 "TestPoint" TestPoint 12525,4925 r90 top
TP116 "TestPoint" TestPoint 13460,5010 r270 bottom
TP117 "TestPoint" TestPoint 14140,4830 r270 top
TP118 "TestPoint" TestPoint 13460,5130 r270 top
TP119 "TestPoint" TestPoint 14480,4930 r270 top
TP121 "TestPoint" TestPoint 12925,5705 r90 top
TP122 "TestPoint" TestPoint 12085,5745 r90 top
TP123 "TestPoint" TestPoint 11285,5005 r90 top
TP124 "TestPoint" TestPoint 13640,5530 r270 top
TP209 "TestPoint" TestPoint 13635,9000 r90 top
TP210 "TestPoint" TestPoint 13555,7980 r90 top
TP212 "TestPoint" TestPoint 13915,7640 r90 top
TP213 "TestPoint" TestPoint 12995,8920 r90 top
TP214 "TestPoint" TestPoint 12355,8540 r90 top
TP215 "TestPoint" TestPoint 12755,8800 r90 top
TP216 "TestPoint" TestPoint 15315,7060 r90 top
TP217 "TestPoint" TestPoint 14295,7140 r180 top
TP218 "TestPoint" TestPoint 13775,7640 r90 top
TP219 "TestPoint" TestPoint 15435,8740 r180 top
TP220 "TestPoint" TestPoint 14475,6140 r90 bottom
TP221 "TestPoint" TestPoint 12450,6310 r90 top
TP222 "TestPoint" TestPoint 15175,7060 r180 top
TP223 "TestPoint" TestPoint 14655,7800 r0 bottom
TP224 "TestPoint" TestPoint 14955,7660 r180 top
TP225 "TestPoint" TestPoint 14115,7780 r90 bottom
TP226 "TestPoint" TestPoint 14615,8140 r180 top
TP227 "TestPoint" TestPoint 13935,7100 r90 top
TP301 "TestPoint" TestPoint 16780,6295 r90 top
TP302 "TestPoint" TestPoint 17080,5935 r90 top
TP303 "TestPoint" TestPoint 17360,7575 r90 top
TP304 "TestPoint" TestPoint 17000,7995 r90 top
TP305 "TestPoint" TestPoint 20560,6075 r90 top
TP306 "TestPoint" TestPoint 19955,5935 r90 top
TP307 "TestPoint" TestPoint 20800,7395 r90 top
TP308 "TestPoint" TestPoint 18700,8035 r90 top
TP309 "TestPoint" TestPoint 19905,7935 r90 top
TP319 "TestPoint" TestPoint 20700,5035 r90 top
TP320 "TestPoint" TestPoint 20940,6775 r90 top
TP321 "TestPoint" TestPoint 16000,7295 r90 top
U101 "ATmega8L-8AI" ATMega_GOOD 12095,5275 r270 bottom
U201 "ATmega8L-8AI" ATMega_GOOD 13245,7730 r270 top
U202 "FSAL200" FSAL200-16QSOP 10805,8720 r90 bottom
U203 "FSAL200" FSAL200-16QSOP 11325,8740 r90 bottom
U204 "NE555" NE555 15160,8090 r270 bottom
U205 "NE555" NE555 15250,8550 r270 bottom
U206 "MCP1630v" "8MSOP (MCP Alternative)" 15110,7210 r0 bottom
U207 "74AC04SC" "74AC04SC 14-SOIC" 14760,7675 r180 top
U301 "ATmega8L-8AI" ATMega_GOOD 18540,7330 r90 bottom
Valve101 "Valve_pcb connector" "Valve_pcb mount" 14948.35,5292.83 r270 top
Valve102 "Header 3H" "Valve_3 pin" 14720,5450 r90 top
Valve103 "Header 3H" "Valve_3 pin" 14560,5450 r90 top
Valve301 "6+SHIELD DIN" "Valve male" 16663.43,6445 r90 top
Valve302 "6+SHIELD DIN" "Valve male" 18416.57,6445 r270 top
Valve303 "6+SHIELD DIN" "Valve male" 20563.43,6445 r90 top
Y101 "XTAL" ABLS-16MHz-B4-T 12495,5695 r0 bottom
Y201 "XTAL" ABLS-16MHz-B4-T 13145,8310 r180 top
Y301 "XTAL" ABLS-16MHz-B4-T 18210,6835 r90 bottom

## Footprints (in the part's own frame and the unit in brackets; to place one, negate y for a bottom-side part, rotate by r counter-clockwise, add the part's x,y. Pads: shape width x height; smd on the part's side, far side on the other; paste and mask are expansions set on the pad)
"2 pin switch (surface mount)" [mm]
  rect 2x2 smd: 1(0,0) 2(4.6,0)
"8MSOP (MCP Alternative)" [mm]
  rect 1.1x0.28 smd: 1(0,0)
  oval 1.1x0.28 smd: 2(0,-0.65) 3(0,-1.3) 4(0,-1.95) 5(4.1,-1.95) 6(4.1,-1.3) 7(4.1,-0.65) 8(4.1,0)
  silkscreen extent 0.2,-2.28 3.9,0.33
"10n MU Capacitor (HV)" [mil]
  round 58 hole 28: 1(0,0) 2(362.2,0)
  silkscreen extent 58,-98 304,98
"12 pole switch" [mm] "rotary switch"
  round 3.175 hole 3.175: 0(0,10.25)
  round 17.5 hole 6.604: 0(0,0.05)
  Keep-Out Layer circle w0.254: c0,10.25 r1.5
  Keep-Out Layer circle w0.254: c0,0 r8.75
"22N MU Capacitor (HV)" [mil]
  round 50 hole 28: 1(0,0) 2(370.08,0)
  silkscreen extent 50,-100 320,100
"74AC04SC 14-SOIC" [mm]
  rect 1.7x0.75 smd: 1(0,0)
  oval 1.7x0.75 smd: 2(0,-1.27) 3(0,-2.54) 4(0,-3.81) 5(0,-5.08) 6(0,-6.35) 7(0,-7.62) 8(5.7,-7.62) 9(5.7,-6.35) 10(5.7,-5.08) 11(5.7,-3.81) 12(5.7,-2.54) 13(5.7,-1.27) 14(5.7,0)
  silkscreen extent 1.68,-8.25 4.02,0.64
0402 [mm]
  rect 0.5x0.6 smd: 1(-0.5,0) 2(0.5,0)
  silkscreen extent -1,-0.5 1,0.5
0603 [mm] "generic 0603 Cap/Res"
  rect 1.1x1 smd: 1(-0.85,0) 2(0.85,0)
  silkscreen extent -1.65,-0.76 1.65,0.76
0805 [mm] "generic 0805 Cap/Res"
  rect 1.3x1.5 smd: 1(-0.95,0) 2(0.95,0)
  silkscreen extent -1.91,-1.02 1.91,1.02
ABLS-16MHz-B4-T [mm] "Abracon ABLS Series 16MHz 18pF Crystal"
  rect 5.8x2.5 smd: 1(-4.75,0) 2(4.75,0)
  silkscreen extent -6.35,-2.35 6.35,2.35
ATMega_GOOD [mm]
  oval 1.5x0.5 smd: 1(-4.15,2.8) 2(-4.15,2) 3(-4.15,1.2) 4(-4.15,0.4) 5(-4.15,-0.4) 6(-4.15,-1.2) 7(-4.15,-2) 8(-4.15,-2.8) 17(4.15,-2.8) 18(4.15,-2) 19(4.15,-1.2) 20(4.15,-0.4) 21(4.15,0.4) 22(4.15,1.2) 23(4.15,2) 24(4.15,2.8)
  oval 0.5x1.5 smd: 9(-2.8,-4.15) 10(-2,-4.15) 11(-1.2,-4.15) 12(-0.4,-4.15) 13(0.4,-4.15) 14(1.2,-4.15) 15(2,-4.15) 16(2.8,-4.15) 25(2.8,4.15) 26(2,4.15) 27(1.2,4.15) 28(0.4,4.15) 29(-0.4,4.15) 30(-1.2,4.15) 31(-2,4.15) 32(-2.8,4.15)
  silkscreen extent -4.27,-3.05 3.05,3.75, body extent -3.5,-3.5 3.5,3.5, height 1.2
"Axial 0.4 MU" [mil]
  round 70 hole 40: 1(0,0) 2(400,0)
  silkscreen extent 70,-100 330,100
BYG20J-E3 [mm]
  rrect50% 2x2 smd: 1(0,0)
  rect 2x2 smd: 3(4,0)
  silkscreen extent -0.04,-1.25 4,1.6
CLV1A-FKB [mm] "Cree RGB SMD LED"
  rrect50% 2x1.3 smd: 1(-1.75,0.75)
  rect 2x1.3 smd: 2(-1.75,-0.75) 3(1.75,-0.75) 4(1.75,0.75)
  silkscreen extent -1.6,-1.4 1.6,1.4
DPAK [mm]
  rect 10x10 smd: 1(8.5,-2.28)
  rect 3.2x1.6 smd: 2(0,0)
  oval 3.2x1.6 smd: 3(0,-4.56)
  silkscreen extent -0.43,-5.7 2.43,1.14
ELL6PG4R7N-2CHK [mm] "Panasonic ELL-6UH100M Inductor 10uH"
  rect 3.8x3.4 smd: 1(-2.85,0) 2(2.85,0)
  silkscreen extent -3.2,-3 3.2,3
EM6K7T2R-EMT6 [mil] "Rohm Dual Channel NMOS"
  rect 27.56x10 smd mask+0: 1(0,0)
  oval 27.56x10 smd mask+0: 2(0,-20) 3(0,-40) 4(66.93,-40) 5(66.93,-20) 6(66.93,0)
  silkscreen extent 12,-49 59,10
FSAL200-16QSOP [mm]
  rect 1.7x0.317 smd: 1(0,0)
  oval 1.7x0.317 smd: 2(0,-0.635) 3(0,-1.27) 4(0,-1.905) 5(0,-2.54) 6(0,-3.175) 7(0,-3.81) 8(0,-4.445) 9(5.4,-4.445) 10(5.4,-3.81) 11(5.4,-3.175) 12(5.4,-2.54) 13(5.4,-1.905) 14(5.4,-1.27) 15(5.4,-0.635) 16(5.4,0)
  silkscreen extent 1.73,-4.76 3.67,0.32
HDR1X2H [mil] "Connector; Header; 2 Position; Right Angle"
  rect 120x120 hole 60: 1(-59.06,47.24)
  round 120 hole 60: 2(166.93,47.24)
  silkscreen extent -51,-250 150,-47
"HV connector" [mm]
  rect 2x2 smd: 1(0,0) 2(7,0)
  silkscreen extent -6,-6 13,6
"LED Headlamp" [mm]
  rect 2x1.5 smd: 1(-2.35,-2.1) 1(-2.35,0) 1(-2.35,2.1) 2(2.35,-2.1) 2(2.35,0) 2(2.35,2.1)
  silkscreen extent -2.67,3.68 1.65,4.83
NE555 [mm]
  rect 2x0.55 smd: 1(0,0)
  oval 2x0.55 smd: 2(0,-1.27) 3(0,-2.54) 4(0,-3.81) 5(4.8,-3.81) 6(4.8,-2.54) 7(4.8,-1.27) 8(4.8,0)
  silkscreen extent 1.84,-4.45 2.97,0.63
"Optical RX" [mm]
  rect 2x2 smd: 1(0,0) 2(4,0) 3(8,0)
"Optical TX" [mm]
  rect 2x2 smd: 1(0,0) 2(4,0) 3(8,0)
REG104-5-DDPAK5 [mm]
  rect 3.4x1 smd: 1(0,0)
  oval 3.4x1 smd: 2(0,-1.7) 3(0,-3.4) 4(0,-5.1) 5(0,-6.8)
  rect 15x12 smd: 6(10,-3.4)
  silkscreen extent 2.53,-7.65 8.07,0.85
"Resistor 1W" [mil]
  round 80 hole 40: 1(-393.7,0) 2(393.7,0)
  silkscreen extent -256,-98 256,98
SATA [mm]
  round 0 hole 1.524 unplated: 0(-6.375,2.362) 0(6.375,2.362)
  rect 0.9x2 smd: 1(3.81,0) 2(2.54,0) 3(1.27,0) 4(0,0) 5(-1.27,0) 6(-2.54,0) 7(-3.81,0)
  silkscreen extent -8.8,0.1 8.8,11.5
"SI3210 SMD Transformer" [mm]
  oval 4x1.2 smd: 0(0,-9.92) 0(16.36,-7.44) 0(16.36,-4.96) 0(16.36,-2.48) 2(0,-2.48) 3(0,-4.96) 4(0,-7.44) 6(16.36,-9.92) 10(16.36,0)
  rect 4x1.2 smd: 1(0,0)
  silkscreen extent 1.84,-11.16 14.53,1.24
"switch pad layout" [mm]
  rect 2x2 smd: 1(3.7,27.5) 2(0,25) 3(3.7,22.5) 5(0,20) 6(3.7,17.5) 7(0,15) 8(3.7,12.5) 9(0,10) 10(3.7,7.5) 11(0,5) 12(3.7,2.5) 13(0,0) 14(3.7,-2.5)
TestPoint [mm]
  rect 2x2 smd: 1(0,0)
"TPS7A4501KTTR heatsinked" [mm]
  rect 3.4x1 smd: 1(0.1,6.8)
  oval 3.4x1 smd: 2(0.1,5.1) 3(0.1,3.4) 4(0.1,1.7) 5(0.1,0)
  rect 26x20 smd: 6(15.7,3.4)
  silkscreen extent 2.63,-0.85 8.17,7.65
TPS61085-MSOP8 [mm] "Ti Step-Up DCDC Converter - MSOP 8 Pin Package"
  rect 1.4x0.38 smd: 1(0,0)
  oval 1.4x0.38 smd: 2(0,-0.65) 3(0,-1.3) 4(0,-1.95) 5(4.35,-1.95) 6(4.35,-1.3) 7(4.35,-0.65) 8(4.35,0)
  silkscreen extent 1.58,-2.28 2.77,0.33
"Valve male" [mm]
  rect 2x2 smd: 1(-4,5) 2(-4,0) 3(0,5) 4(0,0) 5(4,5) 6(4,0)
"Valve_3 pin" [mm] "3 pin connector for half a valve connection"
  rect 2x2 smd: 1(-4,0) 2(0,0) 3(4,0)
"Valve_pcb mount" [mil] "pcb foot print for valve connector mounting"
  round 90 hole 60: 1(-119.29,68.9) 2(-119.29,-68.9) 3(0,137.8) 4(0,0) 5(119.29,68.9) 6(119.29,-68.9)
ValveBattery+VE [mm]
  round 4.5 hole 2.54: 1(-10,0) 1(10,0)
ValveBattery-VE [mm]
  round 13 smd: 1(0,0)